# EAGLE board L298N (EAGLE 6.3)
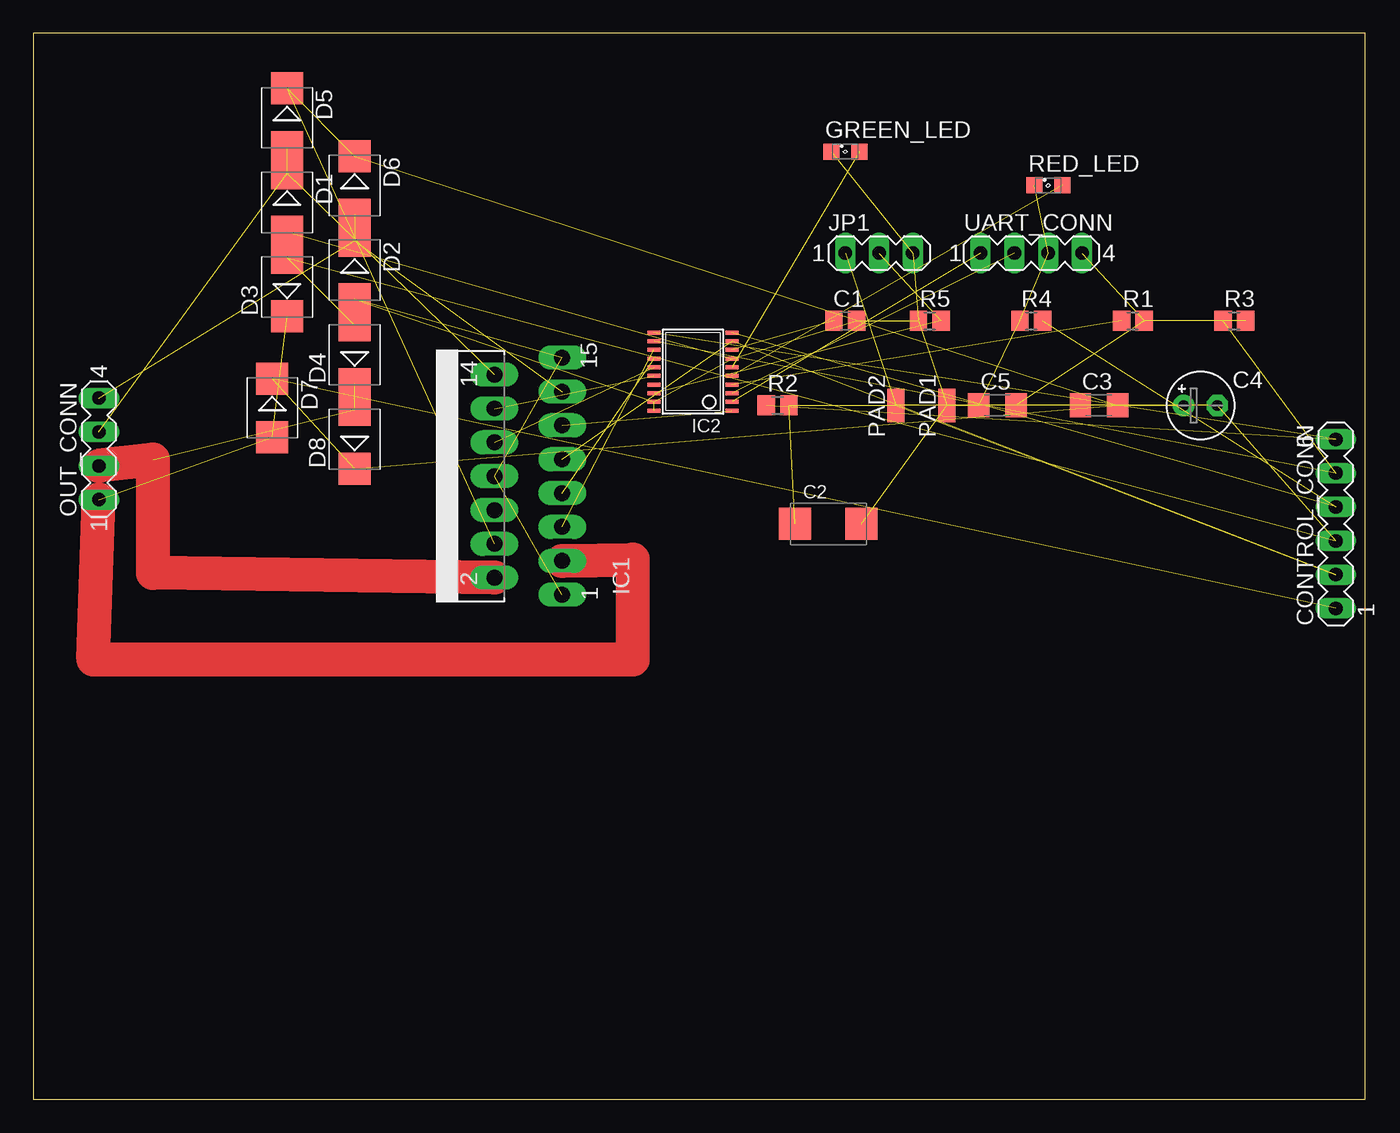
[diagram p0: board, top side]

Size 100 x 80 mm. Coordinates in mm from the lower left corner, seen from the top.
Outline: 0,0 100,0 100,80 0,80 0,0
Copper layers (1*16): Top 0.035mm / dielectric 1.5mm / Bottom 0.035mm
Design rules "default": minimum track width 10mil, minimum drill 24mil, track to track 8mil, track to pad 8mil, pad to pad 8mil, via to via 8mil, smd to smd 8mil, copper to edge 40mil, drill to drill 8mil, minimum pad ring 10mil, minimum via ring 8mil, stop-mask expansion 4mil, vias tented up to drill 0mil, thermal gap 10mil

## Footprints (pad centres in the part's own frame; a part is rotated, then mirrored left to right if it is on the bottom)
C0805 = smd 1.3 x 1.5: 1 -0.85,0; 2 0.85,0
SMC_C = smd 2.4 x 2.4: + -2.5,0; - 2.5,0
C1206 = smd 1.6 x 1.8: 1 -1.4,0; 2 1.4,0
E2,5-5 = drill 0.813 pad 1.6: + -1.27,0 | drill 0.813 pad 1.6 octagon: - 1.27,0
MA06-1 = drill 1.016 long: 1 -6.35,0; 2 -3.81,0; 3 -1.27,0; 4 1.27,0; 5 3.81,0; 6 6.35,0
SMB = smd 2.4 x 2.4: A 2.2,0; C -2.2,0
SML0805 = smd 1.2 x 1.2: A 1.05,0; C -1.05,0
MULTIWATT-15 = drill 1.2 long: 1 -8.89,-7.62; 2 -7.62,-2.54; 3 -6.35,-7.62; 4 -5.08,-2.54; 5 -3.81,-7.62; 6 -2.54,-2.54; 7 -1.27,-7.62; 8 0,-2.54; 9 1.27,-7.62; 10 2.54,-2.54; 11 3.81,-7.62; 12 5.08,-2.54; 13 6.35,-7.62; 14 7.62,-2.54; 15 8.89,-7.62
TSSOP20 = smd 0.305 x 0.991: 1 -2.925,-2.918; 2 -2.275,-2.918; 3 -1.625,-2.918; 4 -0.975,-2.918; 5 -0.325,-2.918; 6 0.325,-2.918; 7 0.975,-2.918; 8 1.625,-2.918; 9 2.275,-2.918; 10 2.925,-2.918; 11 2.925,2.918; 12 2.275,2.918; 13 1.625,2.918; 14 0.975,2.918; 15 0.325,2.918; 16 -0.325,2.918; 17 -0.975,2.918; 18 -1.625,2.918; 19 -2.275,2.918; 20 -2.925,2.918
MA03-1 = drill 1.016 long: 1 -2.54,0; 2 0,0; 3 2.54,0
MA04-1 = drill 1.016 long: 1 -3.81,0; 2 -1.27,0; 3 1.27,0; 4 3.81,0
SMD1,27-2,54 = smd 1.27 x 2.54: 1 0,0
R0805 = smd 1.3 x 1.5: 1 -0.85,0; 2 0.85,0

## Placement (x,y rotation side)
C1  1mF  [C0805]  60.96,58.42 0 top
C2  10mF  [SMC_C]  59.69,43.18 0 top
C3  100nF  [C1206]  80.01,52.07 0 top
C4  470mF  [E2,5-5]  87.63,52.07 0 top
C5  100nF  [C1206]  72.39,52.07 0 top
CONTROL_CONN  [MA06-1]  97.79,43.18 90 top
D1  ES1D  [SMB]  19.05,67.31 270 top
D2  ES1D  [SMB]  24.13,62.23 270 top
D3  ES1D  [SMB]  19.05,60.96 90 top
D4  ES1D  [SMB]  24.13,55.88 90 top
D5  ES1D  [SMB]  19.05,73.66 270 top
D6  ES1D  [SMB]  24.13,68.58 270 top
D7  ES1D  [SMB]  17.95,51.89 270 top
D8  ES1D  [SMB]  24.13,49.53 90 top
GREEN_LED  [SML0805]  60.96,71.12 0 top
IC1  L298  [MULTIWATT-15]  32.08,46.76 90 top
IC2  STM8S103FP  [TSSOP20]  49.53,54.61 90 top
JP1  COOLER_CONN  [MA03-1]  63.5,63.5 0 top
OUT_CONN  [MA04-1]  4.93,48.81 90 top
PAD1  [SMD1,27-2,54]  68.58,52.07 0 top
PAD2  [SMD1,27-2,54]  64.77,52.07 0 top
R1  10kOm  [R0805]  82.55,58.42 0 top
R2  2,4kOm  [R0805]  55.88,52.07 0 top
R3  2,4kOm  [R0805]  90.17,58.42 0 top
R4  1kOm  [R0805]  74.93,58.42 0 top
R5  1kOm  [R0805]  67.31,58.42 0 top
RED_LED  [SML0805]  76.2,68.58 0 top
UART_CONN  [MA04-1]  74.93,63.5 0 top

## Library data of the parts
C1-C5 R1-R5 = resistor
CONTROL_CONN JP1 OUT_CONN UART_CONN = con-lstb; OC_FARNELL: unknown; OC_NEWARK: unknown
D1-D8 = diode
GREEN_LED RED_LED = led
IC1 = st-microelectronics; MPN: L298N; OC_FARNELL: 1589425; OC_NEWARK: 32M1527
IC2 = STM8S103
PAD1 PAD2 = wirepad

## Nets
+5V: C2.+ C5.2 CONTROL_CONN.2 IC1.9 IC2.9 JP1.1 PAD2.1 R1.2 R2.2 R3.2 UART_CONN.4
DIR\I2C_SCL: CONTROL_CONN.5 IC2.12 R3.1
EN: CONTROL_CONN.4 IC2.10 R4.2
GND: C1.2 C2.- C3.1 C4.- C5.1 CONTROL_CONN.3 D1.A D2.A D3.A D4.A GREEN_LED.C IC1.1 IC1.8 IC1.15 IC2.7 IC2.19 IC2.20 JP1.3 PAD1.1 R4.1 R5.1 RED_LED.C UART_CONN.3
N$1: IC2.18 JP1.2 R5.2
N$3: IC1.7 IC2.14
N$4: IC1.10 IC2.15
N$5: IC1.12 IC2.16
N$6: IC1.5 IC2.13
N$7: IC1.11 IC2.1
N$8: IC1.6
N$9: D4.C D8.A IC1.2 OUT_CONN.2
N$10: C1.1 IC2.8
N$11: IC2.4 R1.1
N$12: IC2.5 RED_LED.A
N$13: GREEN_LED.A IC2.6
N$14: D3.C D7.A IC1.3 OUT_CONN.1
N$15: IC2.2 UART_CONN.1
N$16: IC2.3 UART_CONN.2
N$19: D2.C D6.A IC1.13 OUT_CONN.4
N$20: D1.C D5.A IC1.14 OUT_CONN.3
STEP\I2C_SDA: CONTROL_CONN.6 IC2.11 R2.1
VCCIO: C3.2 C4.+ CONTROL_CONN.1 D5.C D6.C D7.C D8.C IC1.4

## Tracks (layer width: path | path; a pad name or v marks a point on that pad's centre or on a via)
+5V  (10 unrouted)
DIR\I2C_SCL  (2 unrouted)
EN  (2 unrouted)
GND  (22 unrouted)
N$1  (2 unrouted)
N$3  (1 unrouted)
N$4  (1 unrouted)
N$5  (1 unrouted)
N$6  (1 unrouted)
N$7  (1 unrouted)
N$9  (2 unrouted)
  Top 2.54: IC1.2 9,39.5 9,48 OUT_CONN.2
N$10  (1 unrouted)
N$11  (1 unrouted)
N$12  (1 unrouted)
N$13  (1 unrouted)
N$14  (2 unrouted)
  Top 2.54: IC1.3 45,40.5 45,33 4.5,33 OUT_CONN.1
N$15  (1 unrouted)
N$16  (1 unrouted)
N$19  (3 unrouted)
N$20  (3 unrouted)
STEP\I2C_SDA  (2 unrouted)
VCCIO  (7 unrouted)